# Allegro board TPA311X_TEST_V10B.brd
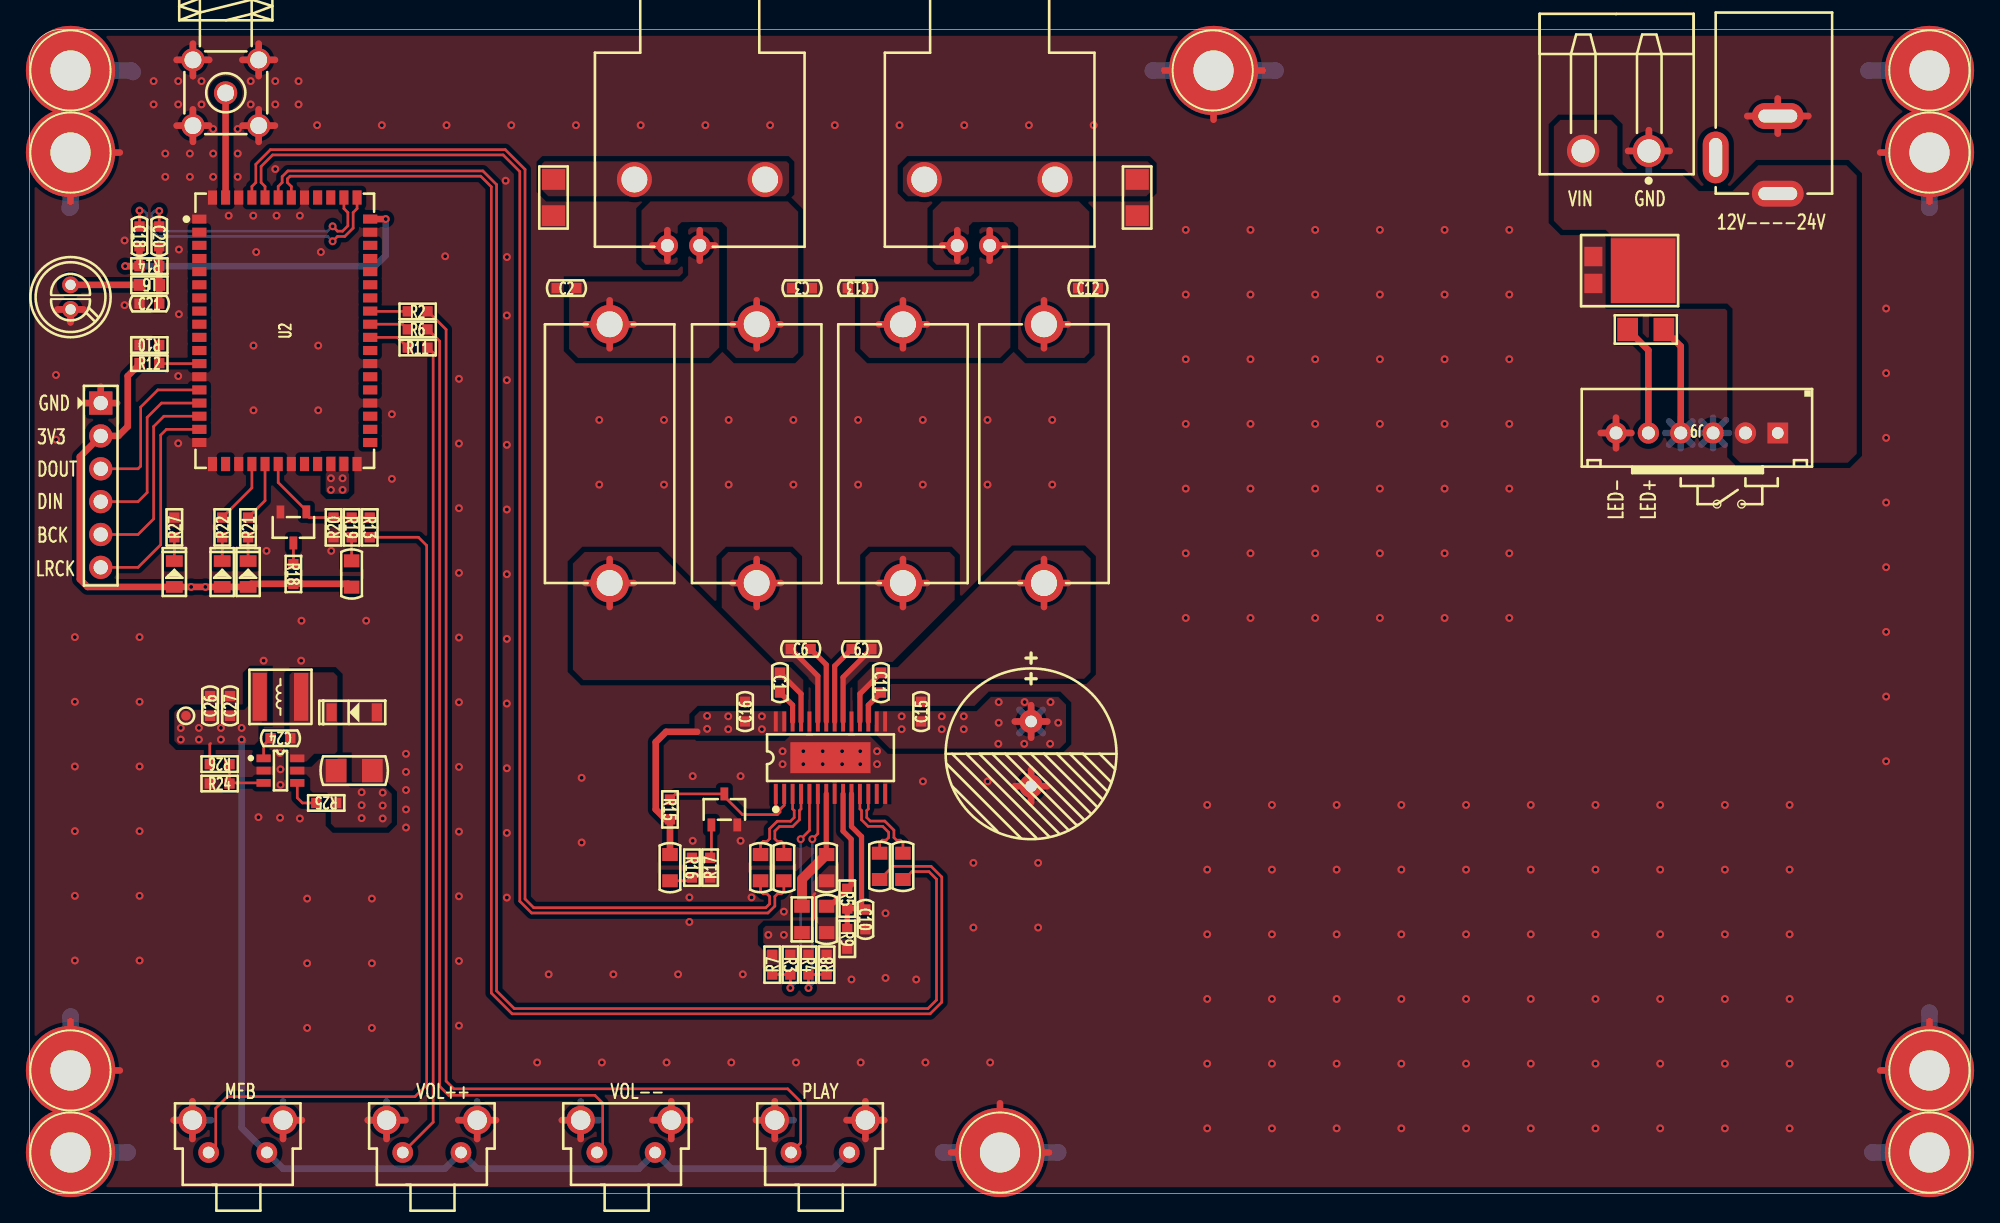
[diagram p0: board, top side]
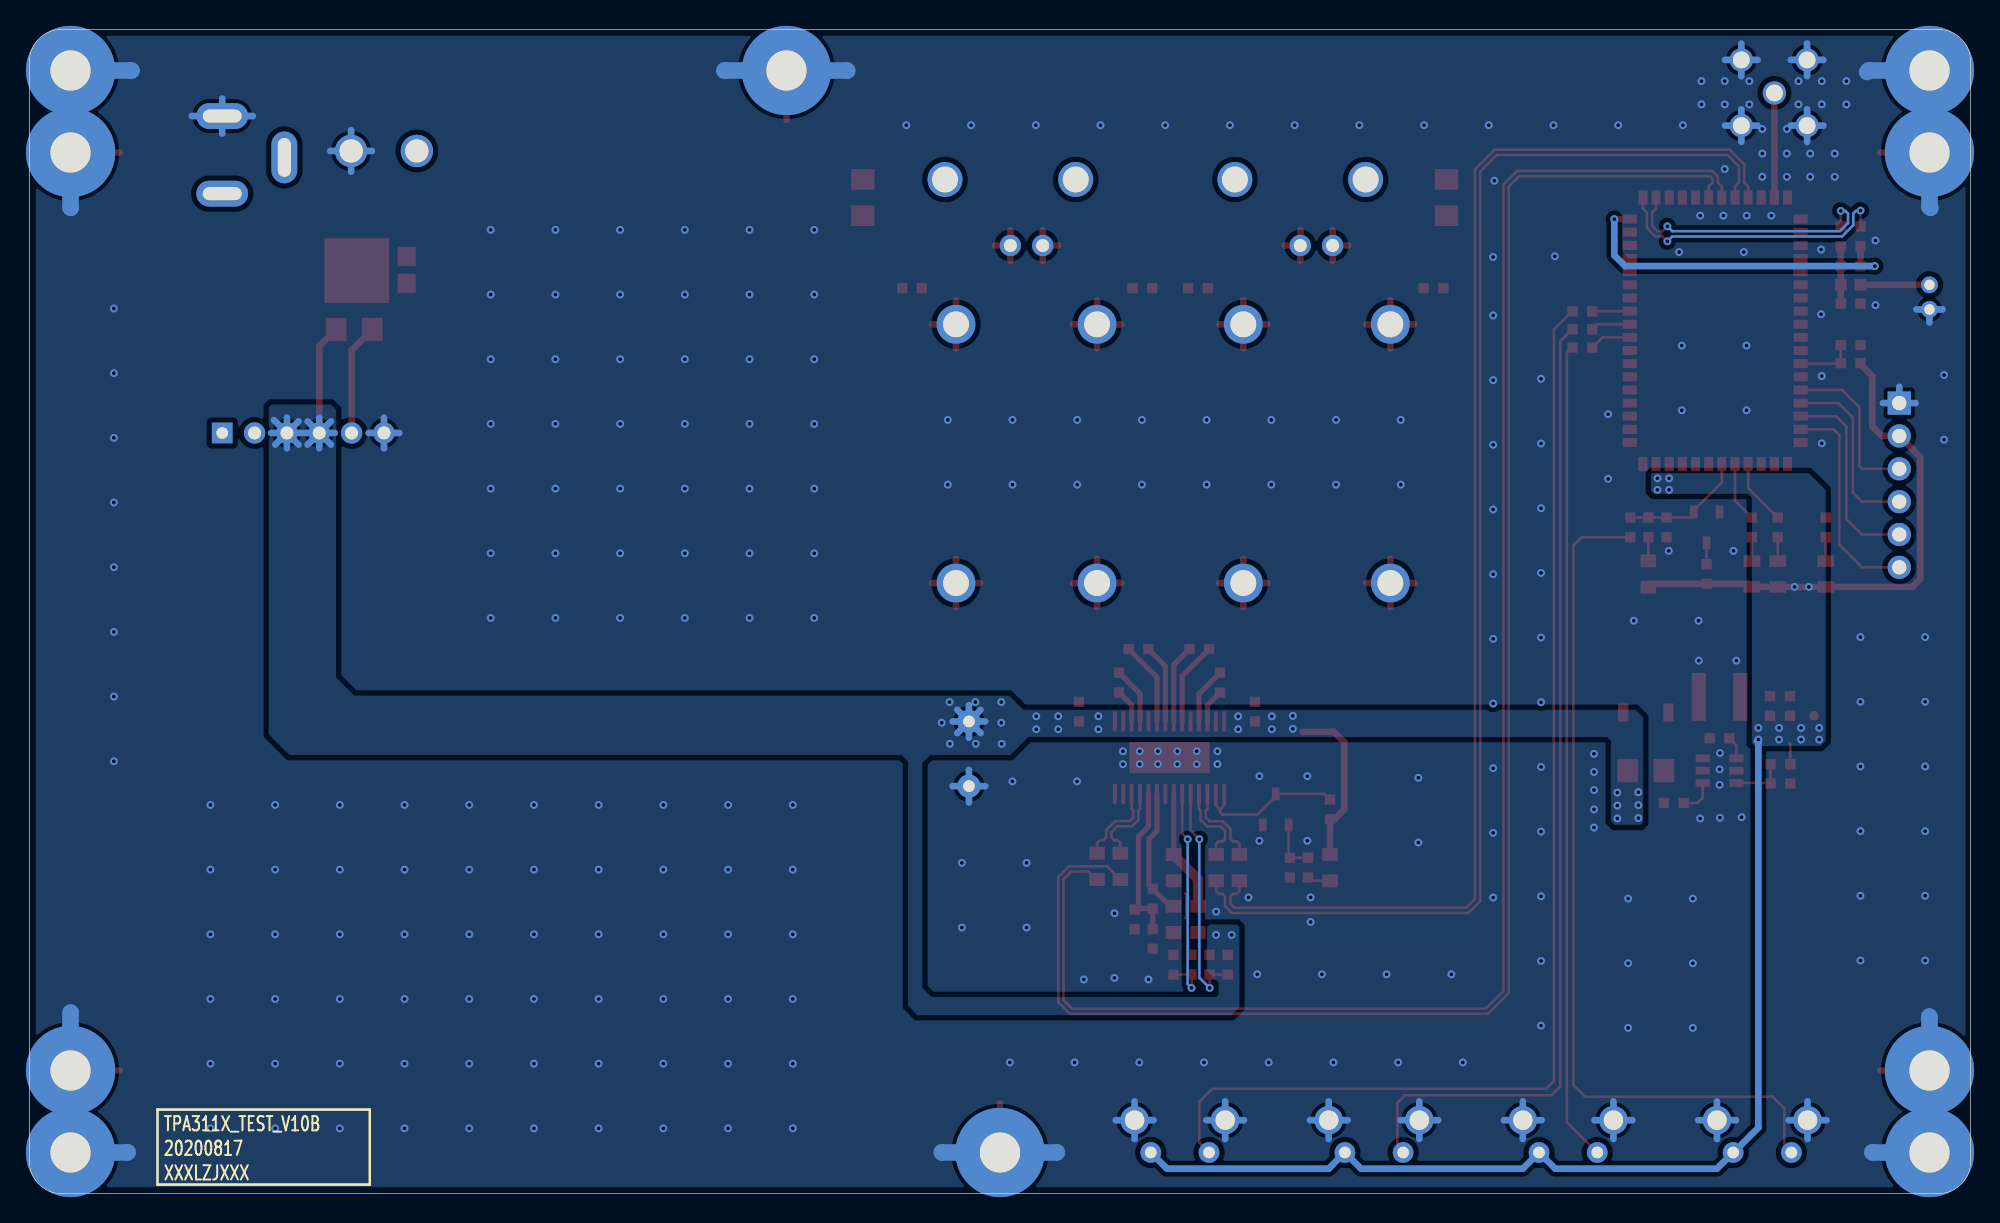
[diagram p1: board, bottom side, seen from below]

Outline 150 x 90 mm; copper layers: TOP, BOTTOM. Coordinates in mm from the lower left corner of the outline.
Outline path: 0,87.5 arc(0.73,89.27) 2.5,90 147.5,90 arc(149.27,89.27) 150,87.5 150,2.5 arc(149.27,0.73) 147.5,0 2.5,0 arc(0.73,0.73) 0,2.5 0,87.5

## Design rules (mm)
constraint set DEFAULT: min track width 0.203, pair gap 0.203
net group LIN: nets LINN LINP
net group MIC_A: nets MIC_AN MIC_AP
net group RIN: nets RINN RINP
net group SPK_L: nets SPK_LN SPK_LP
net group SPK_R: nets SPK_RN SPK_RP

## Placement (name value [footprint] x y rotation side)
C1  220nF_50V  [C0603]  58 39.5 270 top
C2  1nF_50V  [C0603]  41.5 70 0 top
C3  1nF_50V  [C0603]  59.7 70 180 top
C4  1uF_50V  [C0805]  56.5 25.2 90 top
C5  1uF_50V  [C0805]  58.3 25.2 90 top
C6  220nF_50V  [C0603]  59.6 42.1 0 top
C7  1uF_50V  [C0805]  61.6 21.2 90 top
C8  1uF_50V  [C0805]  61.6 25.2 90 top
C9  220nF_50V  [C0603]  64.3 42.1 180 top
C10  10nF_50V  [C0603]  64.6 21.2 270 top
C11  220nF_50V  [C0603]  65.8 39.5 270 top
C12  1nF_50V  [C0603]  81.8 70 0 top
C13  1nF_50V  [C0603]  64 70 180 top
C14  1uF_50V  [C0805]  65.7 25.3 90 top
C15  10nF_50V  [C0603]  68.9 37.26 90 top
C16  10nF_50V  [C0603]  55.3 37.26 90 top
C17  1000uF_50V  [CAP-5R0-13X27]  77.4 34 270 top
C18  100nF_50V  [C0603]  8.51 74 270 top
C19  1uF_50V  [C0805]  67.5 25.3 90 top
C20  100nF_50V  [C0603]  10.03 74 270 top
C21  15pF_50V  [C0603]  9.27 68.8 0 top
C22  1uF_50V  [C0805]  49.5 25.2 90 top
C23  1uF_50V  [C0805]  24.9 47.9 270 top
C24  100nF_50V  [C0603]  19.4 35.2 180 top
C25  10uF_35V  [C1206]  25.1 32.7 0 top
C26  10uF_10V  [C0603]  13.96 37.7 90 top
C27  10uF_10V  [C0603]  15.5 37.7 90 top
D1  LED_RED  [LED0805]  16.9 47.9 90 top
D2  LED_BLUE  [LED0805]  14.9 47.9 90 top
D3  LMBR140  [SOD123]  25.1 37.2 0 top
D4  V10P10  [TO-277A]  122.2 71.4 270 top
D5  LED_RED  [LED0805]  11.2 47.9 90 top
DC1  -  [DC005]  135.1 83.3 270 top
J1  SMA-50R/NI  [SMA-50R-DIP]  15.18 85.1 90 top
J2  -  [CN1X6-2P54-Z]  5.51 61.11 270 top
J5  WJ2EDGRC-5.08-2P  [WJ2EDGRC-5R08-2P]  122.6 80.6 180 top
J9  -  [HX25035-6A]  128.85 58.8 180 top
L1  1mH  [L-10MMX20MM]  44.84 57.2 90 top
L2  1mH  [L-10MMX20MM]  56.2 57.2 90 top
L3  1mH  [L-10MMX20MM]  67.5 57.2 90 top
L4  1mH  [L-10MMX20MM]  78.4 57.2 90 top
L5  15nH  [L0603]  9.27 70.25 180 top
L6  SWPA4020S150MT  [L4020]  19.4 38.4 180 top
MH1  HOLD-M3/NI  [HOLD6R90X3R10]  3.18 3.18 0 top
MH2  HOLD-M3/NI  [HOLD6R90X3R10]  75 3.18 0 top
MH3  HOLD-M3/NI  [HOLD6R90X3R10]  146.82 3.18 0 top
MH4  HOLD-M3/NI  [HOLD6R90X3R10]  146.82 9.52 0 top
MH5  HOLD-M3/NI  [HOLD6R90X3R10]  3.18 9.52 0 top
MH6  HOLD-M3/NI  [HOLD6R90X3R10]  146.82 80.48 0 top
MH7  HOLD-M3/NI  [HOLD6R90X3R10]  146.82 86.82 0 top
MH8  HOLD-M3/NI  [HOLD6R90X3R10]  91.5 86.82 0 top
MH9  HOLD-M3/NI  [HOLD6R90X3R10]  3.18 86.82 0 top
MH10  HOLD-M3/NI  [HOLD6R90X3R10]  3.18 80.48 0 top
NOREF  -  []  0 0 90 top
NOREF#2  -  []  0 0 90 top
NOREF#3  -  []  0 0 90 top
NOREF#4  -  []  0 0 0 top
NOREF#5  -  []  0 0 0 top
NOREF#6  -  []  0 0 0 top
NOREF#7  -  []  0 0 0 top
NOREF#8  -  []  0 0 0 top
NOREF#9  -  []  0 0 90 top
NOREF#10  -  []  0 0 90 top
Q1  MMBT3904  [SOT23-3]  53.7 29.7 0 top
Q2  MMBT3904  [SOT23-3]  20.4 51.5 180 top
R1  10R  [R0805]  59.7 21.2 90 top
R2  1K  [R0603]  30 68.2 0 top
R3  0R/NI  [R0603]  58.8 17.7 270 top
R4  0R/NI  [R0603]  60.2 17.7 270 top
R5  10K  [R0603]  63.2 22.8 270 top
R6  1K  [R0603]  30 66.81 0 top
R7  0R  [R0603]  57.4 17.7 90 top
R8  0R  [R0603]  61.6 17.7 90 top
R9  10K  [R0603]  63.2 19.7 270 top
R10  0R/NI  [R0603]  9.27 65.6 180 top
R11  1K  [R0603]  30 65.4 0 top
R12  0R/NI  [R0603]  9.27 64.2 0 top
R13  1K  [R0603]  26.3 51.5 270 top
R14  2.2K  [R0603]  9.27 71.7 180 top
R15  100K  [R0603]  49.5 29.7 270 top
R16  47K  [R0603]  51.2 25.2 270 top
R17  10K  [R0603]  52.6 25.2 90 top
R18  10K  [R0603]  20.4 47.9 270 top
R19  1K  [R0603]  24.9 51.5 270 top
R20  10K  [R0603]  23.5 51.5 90 top
R21  1K  [R0603]  16.9 51.5 90 top
R22  1K  [R0603]  14.9 51.5 90 top
R23  0R  [R1206]  85.6 77 90 top
R24  40.2K  [R0603]  14.7 31.7 0 top
R25  499K  [R0603]  22.94 30.2 180 top
R26  124K  [R0603]  14.7 33.2 180 top
R27  10K  [R0603]  11.2 51.5 90 top
R28  10K  [R1206]  124.9 66.8 180 top
R29  0R  [R1206]  40.5 77 90 top
SW1  KEY  [SW-6X6X6-L]  61.1 3.18 0 top
SW2  KEY  [SW-6X6X6-L]  46.1 3.18 0 top
SW3  KEY  [SW-6X6X6-L]  31.1 3.18 0 top
SW4  KEY  [SW-6X6X6-L]  16.1 3.18 0 top
TP1  TestPoint/NI  [TP-0R75]  12.1 36.94 0 top
U1  TPA3110D2PWPR  [HTSSOP28-9R7X4R4X0R65-6R1X2R4]  61.9 33.7 0 top
U2  -  [BTM308-C]  19.73 66.7 0 top
U3  -  [MIC]  3.18 69.3 270 top
U4  -  [RCA-SOCKET]  51.8 73.29 270 top
U5  -  [RCA-SOCKET]  74.2 73.29 270 top
U6  MP2456GJ  [SOT23-6]  19.4 32.7 270 top

## Library data of the parts
C1-C16 C18-C23 = CAP NP_2
C17 = CAPT_100UF_3528_6r3V_10%_LXXXX
C24-C27 = CAP NP
D1 D2 D5 = LED_4
D3 = DIODE13_9
D4 = DIODE13_6
DC1 = DC005
J1 = SMA-50R_0
J2 J9 = CONN RCPT 6
J5 = CONN RCPT 2
L1-L6 = INDUCTOR_0
MH1-MH10 = Hold_1
Q1 Q2 = L14G1/TO_2
R1-R29 = R_Generic
SW1-SW4 = SWITCH-SPST-4P
TP1 = TestPoint
U1 = TPA3110D2PWPR
U2 = BTM308-C_0
U3 = MIC
U4 U5 = RCA-SOCKET
U6 = MP2451DT

## Footprints (pads in the part's own frame, mm; a bottom-side part is the same pattern mirrored in y, then rotated)
BTM308-C
  rect 1.1x0.7 smd: 1(-6.6,8.636) 2(-6.6,7.62) 3(-6.6,6.604) 4(-6.6,5.588) 5(-6.6,4.572) 6(-6.6,3.556) 7(-6.6,2.54) 8(-6.6,1.524) 9(-6.6,0.508) 10(-6.6,-0.508) 11(-6.6,-1.524) 12(-6.6,-2.54) 13(-6.6,-3.556) 14(-6.6,-4.572) 15(-6.6,-5.588) 16(-6.6,-6.604) 17(-6.6,-7.62) 18(-6.6,-8.636) 31(6.6,-8.636) 32(6.6,-7.62) 33(6.6,-6.604) 34(6.6,-5.588) 35(6.6,-4.572) 36(6.6,-3.556) 37(6.6,-2.54) 38(6.6,-1.524) 39(6.6,-0.508) 40(6.6,0.508) 41(6.6,1.524) 42(6.6,2.54) 43(6.6,3.556) 44(6.6,4.572) 45(6.6,5.588) 46(6.6,6.604) 47(6.6,7.62) 48(6.6,8.636)
  rect 0.7x1.1 smd: 19(-5.588,-10.3) 20(-4.572,-10.3) 21(-3.556,-10.3) 22(-2.54,-10.3) 23(-1.524,-10.3) 24(-0.508,-10.3) 25(0.508,-10.3) 26(1.524,-10.3) 27(2.54,-10.3) 28(3.556,-10.3) 29(4.572,-10.3) 30(5.588,-10.3) 49(5.588,10.3) 50(4.572,10.3) 51(3.556,10.3) 52(2.54,10.3) 53(1.524,10.3) 54(0.508,10.3) 55(-0.508,10.3) 56(-1.524,10.3) 57(-2.54,10.3) 58(-3.556,10.3) 59(-4.572,10.3) 60(-5.588,10.3)
C0603
  rect 0.8x0.8 smd: 1(-0.762,0) 2(0.762,0)
C0805
  rect 1x1.2 smd: 1(-1.016,0) 2(1.016,0)
C1206
  rect 1.6x1.8 smd: 1(-1.4,0) 2(1.4,0)
CAP-5R0-13X27
  round 1.8 hole 0.9: 1(-2.5,0) 2(2.5,0)
CN1X6-2P54-Z
  rect 1.8x1.8 hole 1.1: 1(0,0)
  round 1.8 hole 1.1: 2(2.54,0) 3(5.08,0) 4(7.62,0) 5(10.16,0) 6(12.7,0)
DC005
  oval 2x4 hole 1x3: 1(6,0) 2(0,0)
  oval 4x2 hole 3x1: 3(3.2,-4.8)
HOLD6R90X3R10
  round 6.9 hole 3.1: 1(0,0)
HTSSOP28-9R7X4R4X0R65-6R1X2R4
  rect 0.3x1.55 smd: 1(-4.225,-2.8) 2(-3.575,-2.8) 3(-2.925,-2.8) 4(-2.275,-2.8) 5(-1.625,-2.8) 6(-0.975,-2.8) 7(-0.325,-2.8) 8(0.325,-2.8) 9(0.975,-2.8) 10(1.625,-2.8) 11(2.275,-2.8) 12(2.925,-2.8) 13(3.575,-2.8) 14(4.225,-2.8) 15(4.225,2.8) 16(3.575,2.8) 17(2.925,2.8) 18(2.275,2.8) 19(1.625,2.8) 20(0.975,2.8) 21(0.325,2.8) 22(-0.325,2.8) 23(-0.975,2.8) 24(-1.625,2.8) 25(-2.275,2.8) 26(-2.925,2.8) 27(-3.575,2.8) 28(-4.225,2.8)
  rect 6.2x2.4 smd: 29(0,0)
HX25035-6A
  rect 1.6x1.6 hole 0.9: 1(-6.25,0)
  round 1.65 hole 1: 2(-3.75,0) 3(-1.25,0) 4(1.25,0) 5(3.75,0) 6(6.25,0)
L0603
  rect 0.914x0.914 smd: 1(-0.762,0) 2(0.762,0)
L4020
  rect 1.1x3.7 smd: 1(-1.6,0) 2(1.6,0)
L-10MMX20MM
  round 3 hole 2: 1(-10,0) 2(10,0)
LED0805
  rect 0.9x1.3 smd: 1(-1,0) 2(1,0)
MIC
  round 1.3 hole 0.8: 1(-0.95,0) 2(0.95,0)
R0603
  rect 0.8x0.8 smd: 1(-0.762,0) 2(0.762,0)
R0805
  rect 1x1.2 smd: 1(-1.016,0) 2(1.016,0)
R1206
  rect 1.6x1.8 smd: 1(-1.4,0) 2(1.4,0)
RCA-SOCKET
  round 1.65 hole 1: 1(0,0) 2(0,-2.5)
  round 2.7 hole 2: 3(-5.1,5.05) 4(-5.1,-5.05)
SMA-50R-DIP
  round 1.8 hole 1.3: 1(-0.016,0.016) 2(-2.54,2.54) 3(-2.54,-2.54) 4(2.54,-2.54) 5(2.54,2.54)
SOD123
  rect 0.8x1.4 smd: 1(1.75,0) 2(-1.75,0)
SOT23-3
  rect 0.6x1 smd: 1(-1,-1.2) 2(1,-1.2) 3(0,1.2)
SOT23-6
  rect 0.6x1.1 smd: 1(-0.95,-1.3) 2(0,-1.3) 3(0.95,-1.3) 4(0.95,1.3) 5(0,1.3) 6(-0.95,1.3)
SW-6X6X6-L
  round 2.2 hole 1.5: 1(-3.5,2.5) 4(3.5,2.5)
  round 1.6 hole 0.9: 2(-2.25,0) 3(2.25,0)
TO-277A
  rect 1.5x1.4 smd: 1(-1.04,-1.35) 2(1.04,-1.35)
  rect 5x5 smd: 3(0.05,2.5)
TP-0R75
  round 0.75 smd: 1(0,0)
WJ2EDGRC-5R08-2P
  round 2.5 hole 1.8: 1(-2.54,0) 2(2.54,0)

## Nets
GND: C2.1 C3.1 C7.1 C8.1 C10.2 C12.2 C13.2 C15.2 C16.2 C17.2 C21.1 C25.2 C26.2 C27.2 D3.1 D4.1 D4.2 DC1.2 J1.2 J1.3 J1.4 J1.5 J2.1 J5.1 J9.6 MH1.1 MH2.1 MH3.1 MH4.1 MH5.1 MH6.1 MH7.1 MH8.1 MH9.1 MH10.1 Q1.2(E) Q2.2(E) R7.2 R8.2 R9.2 R10.2 R17.1 R20.1 R23.1 R24.1 R27.2 R29.1 SW1.1 SW1.4 SW2.1 SW2.4 SW3.1 SW3.4 SW4.1 SW4.4 U1.8 U1.14 U1.19 U1.24 U1.29 U2.1 U2.13 U2.18 U2.19 U2.21 U2.25 U2.30 U2.34 U2.37 U2.47 U2.53 U2.58 U2.60 U3.2(-) U6.2
VCC_3.3V: C23.2 C26.1 C27.1 D1.1 D2.1 D5.1 J2.2 L6.2 R12.1 R18.2 R26.2 SW1.3 SW2.3 SW3.3 SW4.3 TP1.1 U2.28 U2.29
VCC_24V: C15.1 C16.1 C17.1 C22.2 C25.1 J9.3 J9.4 R1.1 R3.1 R4.1 R15.2 R25.1 R28.1 U1.15 U1.16 U1.27 U1.28 U6.5(VIN)
VCC_24V_IN: D4.3(CATHODE) DC1.1 J5.2 J9.1 J9.2
GAIN0: R3.2 R7.1 U1.5
GAIN1: R4.2 R8.1 U1.6
IIS_BCK: J2.5 U2.16
IIS_DATA_IN: J2.4 U2.15
IIS_DATA_OUT: J2.3 U2.14
IIS_LRCK: J2.6 U2.17
KEY0: R2.1 U2.41
KEY1: R6.1 U2.40
KEY2: R11.1 U2.39
LED0: R21.2 U2.23
LED1: R22.2 U2.22
LED+: J9.5 R28.2
LINN: C5.2 U1.4
LINP: C4.2 U1.3
MFB: Q2.1 R13.1 R19.1 R20.2 U2.24
MIC_AN: C18.1 U2.49
MIC_AP: C20.1 U2.50
MIC_BIAS: C18.2 R14.2 U2.48
OUTL_N: C3.2 L2.2 U4.2
OUTL_P: C2.2 L1.2 U4.1
OUTR_N: C12.1 L4.2 U5.2
OUTR_P: C13.1 L3.2 U5.1
RF_ANT: J1.1 U2.59
RINN: C14.2 U1.11
RINP: C19.2 U1.12
SD: Q1.3 R15.1 U1.1(S\D\) U1.2
SPK_LN: C5.1 U2.56
SPK_LP: C4.1 U2.57
SPK_RN: C14.1 U2.54
SPK_RP: C19.1 U2.55
N17106206: C8.2 R1.2 U1.7
N17106914: C7.2 R5.1 U1.9
N17107482: C10.1 R5.2 R9.1 U1.10
N17107682: C1.2 U1.26
N17107694: C1.1 L1.1 U1.25
N17107988: C6.2 U1.22
N17107991: C6.1 L2.1 U1.23
N17109509: C9.2 U1.21
N17110158: C9.1 L3.1 U1.20
N17110390: C11.1 L4.1 U1.18
N17110423: C11.2 U1.17
N17131851: R10.1 R12.2 U2.12
N17139476: R11.2 SW3.2
N17139479: R6.2 SW2.2
N17139482: R2.2 SW1.2
N17139571: R13.2 SW4.2
N17139755: L5.2 U3.1
N17140355: C20.2 C21.2 L5.1 R14.1
N17141241: Q2.3 R18.1
N17141960: C23.1 R19.2
N17143378: D1.2(CATHODE) R21.1
N17143400: D2.2(CATHODE) R22.1
N17144540: C22.1 R16.2
N17144552: Q1.1 R16.1 R17.2
N17146336: C24.1 D3.2(ANODE_2) L6.1 U6.6
N17146514: R24.2 R26.1 U6.3
N17146924: R25.2 U6.4
N17147250: C24.2 U6.1
N17149786: R29.2 U4.3 U4.4
N17149794: R23.2 U5.3 U5.4
N17153384: D5.2(CATHODE) R27.1

Pads without a net: DC1 3; U1 13; U2 2 3 4 5 6 7 8 9 10 11 20 26 27 31 32 33 35 36 38 42 43 44 45 46 51 52

## Via types
v1: diameter 0.61, hole 0.305, TOP to BOTTOM, 337 vias

## Routing (per net, layer and track width the routed paths; a pad name or vN(x,y) marks a point on that pad's centre or on a via; arc(x,y) is an arc through that point)
GND: length 317.1
  TOP w0.203: 60.7,23.2 60.6,23.1 60.6,21.4 60.7,21.3
  TOP w0.508: C17.2 78.66,31.5 ; C17.2 77.4,32.76 ; C17.2 77.4,30.24 ; C17.2 76.14,31.5 ; 12.64,81.3 J1.2 ; J1.2 13.89,82.56 ; J1.2 11.38,82.56 ; J1.2 12.64,83.82 ; 12.6,4.22 SW4.1 ; SW4.1 12.6,7.14 ; SW4.1 11.14,5.68 ; SW1.1 57.6,7.14 ; SW1.1 57.6,4.22 ; SW1.1 56.14,5.68 ; 135.1,81.94 DC1.2 ; DC1.2 132.74,83.3 ; DC1.2 135.1,84.66 ; DC1.2 137.46,83.3 ; 16.46,87.64 J1.4 ; J1.4 17.72,86.38 ; J1.4 18.97,87.64 ; J1.4 17.72,88.9 ; SW1.4 66.06,5.68 ; SW1.4 63.14,5.68 ; SW1.4 64.6,7.14 ; SW1.4 64.6,4.22 ; 17.72,81.3 J1.3 ; J1.3 17.72,83.82 ; J1.3 18.97,82.56 ; J1.3 16.46,82.56 ; J5.1 125.14,82.21 ; J5.1 123.53,80.6 ; J5.1 126.75,80.6 ; J2.1 5.51,62.37 ; J2.1 4.26,61.11 ; J2.1 6.77,61.11 ; 87.69,86.82 MH8.1 ; MH8.1 91.5,83.01 ; MH8.1 95.31,86.82 ; 27.6,4.22 SW3.1 ; SW3.1 29.06,5.68 ; SW3.1 26.14,5.68 ; 12.64,86.38 J1.5 ; J1.5 12.64,88.9 ; J1.5 11.38,87.64 ; J1.5 13.89,87.64 ; 146.82,76.67 MH6.1 143.01,80.48 ; 49.6,4.22 SW2.4 ; SW2.4 48.14,5.68 ; SW2.4 51.06,5.68 ; SW2.4 49.6,7.14 ; 42.6,4.22 SW2.1 41.14,5.68 ; 33.14,5.68 SW3.4 ; SW3.4 36.06,5.68 ; SW3.4 34.6,4.22 ; 2.17,68.35 U3.2 ; U3.2 3.18,67.34 ; U3.2 4.19,68.35 ; MH2.1 75,6.99 ; MH2.1 78.81,3.18 ; MH2.1 71.19,3.18 ; J9.6 122.6,59.98 ; J9.6 121.42,58.8 ; J9.6 123.78,58.8 ; J9.6 122.6,57.62 ; 143.01,9.52 MH4.1 146.82,13.33 ; 19.6,4.22 SW4.4 ; SW4.4 18.14,5.68 ; SW4.4 21.06,5.68 ; 3.18,76.67 MH10.1 6.99,80.48 ; 3.18,13.33 MH5.1 6.99,9.52
  BOTTOM w0.508: 34.6,4.22 SW3.4 ; SW3.4 33.14,5.68 ; SW3.4 34.6,7.14 ; SW3.4 36.06,5.68 ; C17.2 78.66,31.5 ; C17.2 76.14,31.5 ; C17.2 77.4,32.76 ; C17.2 77.4,30.24 ; 125.14,78.99 J5.1 ; J5.1 126.75,80.6 ; J5.1 125.14,82.21 ; J5.1 123.53,80.6 ; J1.3 17.72,83.82 ; J1.3 17.72,81.3 ; J1.3 16.46,82.56 ; J1.3 18.97,82.56 ; 12.64,81.3 J1.2 ; J1.2 11.38,82.56 ; J1.2 12.64,83.82 ; J1.2 13.89,82.56 ; J9.6 122.6,59.98 ; J9.6 121.42,58.8 ; J9.6 123.78,58.8 ; J9.6 122.6,57.62 ; SW2.1 42.6,7.14 ; SW2.1 42.6,4.22 ; SW2.1 44.06,5.68 ; SW2.1 41.14,5.68 ; 19.6,4.22 SW4.4 ; SW4.4 18.14,5.68 ; SW4.4 21.06,5.68 ; SW4.4 19.6,7.14 ; J1.5 13.89,87.64 ; J1.5 11.38,87.64 ; J1.5 12.64,88.9 ; J1.5 12.64,86.38 ; 63.14,5.68 SW1.4 ; SW1.4 64.6,4.22 ; SW1.4 66.06,5.68 ; SW1.4 64.6,7.14 ; 48.14,5.68 SW2.4 ; SW2.4 49.6,7.14 ; SW2.4 49.6,4.22 ; SW2.4 51.06,5.68 ; SW3.1 27.6,7.14 ; SW3.1 29.06,5.68 ; SW3.1 26.14,5.68 ; SW3.1 27.6,4.22 ; 135.1,81.94 DC1.2 ; DC1.2 137.46,83.3 ; DC1.2 132.74,83.3 ; DC1.2 135.1,84.66 ; J2.1 5.51,62.37 ; J2.1 4.26,61.11 ; J2.1 6.77,61.11 ; 17.72,86.38 J1.4 ; J1.4 17.72,88.9 ; J1.4 18.97,87.64 ; J1.4 16.46,87.64 ; SW1.1 59.06,5.68 ; SW1.1 57.6,4.22 ; SW1.1 56.14,5.68 ; SW1.1 57.6,7.14 ; SW4.1 12.6,7.14 ; SW4.1 14.06,5.68 ; SW4.1 12.6,4.22 ; SW4.1 11.14,5.68 ; 3.18,67.34 U3.2 ; U3.2 2.17,68.35 ; U3.2 4.19,68.35
  BOTTOM w1.27: 146.8,76.2 146.82,76.22 MH6.1 MH7.1 142.12,86.82 142.1,86.8 ; 3.1,76.2 3.18,76.28 MH10.1 MH9.1 7.88,86.82 8,86.7 ; 3.2,13.7 3.18,13.68 MH5.1 MH1.1 7.58,3.18 7.6,3.2 ; 79.5,3.2 79.48,3.18 MH2.1 70.62,3.18 70.6,3.2 ; 146.8,14 146.82,13.98 MH4.1 MH3.1 142.42,3.18 142.4,3.2 ; 86.8,86.8 86.82,86.82 MH8.1 96.28,86.82 96.3,86.8
  vias: v1(2.05,63.28) v1(2.05,58.28) v1(3.51,43.02) v1(3.51,38.02) v1(3.51,33.02) v1(3.51,28.02) v1(3.51,23.02) v1(3.51,18.02) v1(7.35,73.68) v1(7.35,68.68) v1(8.51,43.02) v1(8.51,38.02) v1(8.51,33.02) v1(8.51,28.02) v1(8.51,23.02) v1(8.51,18.02) v1(9.6,86) v1(9.6,84.2) v1(10.5,80.4) v1(10.5,78.6) v1(11.5,86) v1(11.5,84.2) v1(11.5,63.2) v1(11.5,58) v1(11.55,72.98) v1(11.55,67.98) v1(12.4,80.4) v1(12.4,78.6) v1(13.3,86) v1(13.3,84.2) v1(14.2,82.3) v1(14.2,80.4) v1(14.2,78.6) v1(15.4,75.6) v1(16.1,82.3) v1(16.1,80.4) v1(16.1,78.6) v1(17.1,86) v1(17.1,84.2) v1(17.3,75.6) v1(17.32,65.55) v1(17.32,60.55) v1(17.52,72.79) v1(17.7,29.1) v1(18.1,41.2) v1(18.32,49.69) v1(19,86) v1(19,84.2) v1(19,79.2) v1(19.1,75.6) v1(19.37,34.06) v1(19.4,32.8) v1(19.4,31.6) v1(19.37,29.06) v1(20.8,86) v1(20.8,84.2) v1(20.9,75.6) v1(20.9,29) v1(21.02,44.29) v1(21,41.2) v1(21.46,22.81) v1(21.46,17.81) v1(21.46,12.81) v1(22.23,82.59) v1(22.32,65.55) v1(22.32,60.55) v1(22.52,72.79) v1(23.32,49.69) v1(26.02,44.29) v1(26.46,22.81) v1(26.46,17.81) v1(26.46,12.81) v1(27.23,82.59) v1(28.01,60.25) v1(28.01,55.25) v1(29.1,34) v1(29.1,32.6) v1(29.1,31.2) v1(29.1,29.7) v1(29.1,28.3) v1(32.13,72.46) v1(32.23,82.59) v1(33.19,62.99) v1(33.19,57.99) v1(33.19,52.99) v1(33.19,47.99) v1(33.19,42.99) v1(33.19,37.99) v1(33.19,32.99) v1(33.19,27.99) v1(33.19,22.99) v1(33.19,17.99) v1(33.19,12.99) v1(36.8,78.3) v1(36.9,72.4) v1(36.89,67.89) v1(36.89,62.89) v1(36.89,57.89) v1(36.89,52.89) v1(36.89,47.89) v1(36.89,42.89) v1(36.89,37.89) v1(36.89,32.89) v1(36.89,27.89) v1(36.89,22.89) v1(37.23,82.59) v1(39.24,10.14) v1(40.13,16.95) v1(42.23,82.59) v1(42.67,32.14) v1(42.67,27.14) v1(44.04,59.81) v1(44.04,54.81) v1(44.24,10.14) v1(45.13,16.95) v1(47.23,82.59) v1(49.04,59.81) v1(49.04,54.81) v1(49.24,10.14) v1(50.13,16.95) v1(51,22.9) v1(51,21) v1(51.25,32.27) v1(51.25,27.27) v1(52.23,82.59) v1(54.04,59.81) v1(54.04,54.81) v1(54.24,10.14) v1(54.95,32.27) v1(54.95,27.27) v1(55.13,16.95) v1(55.8,22.9) v1(57.23,82.59) v1(58.2,34.2) v1(58.2,33.2) v1(58.3,21.8) v1(59.04,59.81) v1(59.04,54.81) v1(59.24,10.14) v1(59.8,34.2) v1(59.8,33.2) v1(61.3,34.2) v1(61.3,33.2) v1(62.23,82.59) v1(62.8,34.2) v1(62.8,33.2) v1(63.53,16.55) v1(64.04,59.81) v1(64.04,54.81) v1(64.2,34.2) v1(64.2,33.2) v1(64.24,10.14) v1(65.5,34.2) v1(65.5,33.2) v1(66.15,21.67) v1(66.15,16.67) v1(67.23,82.59) v1(68.53,16.55) v1(69.04,59.81) v1(69.04,54.81) v1(69.04,31.87) v1(69.24,10.14) v1(72.23,82.59) v1(72.94,25.57) v1(72.94,20.57) v1(74.04,59.81) v1(74.04,54.81) v1(74.04,31.87) v1(74.24,10.14) v1(77.23,82.59) v1(77.94,25.57) v1(77.94,20.57) v1(79.04,59.81) v1(79.04,54.81) v1(82.23,82.59) v1(89.35,74.5) v1(89.35,69.5) v1(89.35,64.5) v1(89.35,59.5) v1(89.35,54.5) v1(89.35,49.5) v1(89.35,44.5) v1(91.01,30.05) v1(91.01,25.05) v1(91.01,20.05) v1(91.01,15.05) v1(91.01,10.05) v1(91.01,5.05) v1(94.35,74.5) v1(94.35,69.5) v1(94.35,64.5) v1(94.35,59.5) v1(94.35,54.5) v1(94.35,49.5) v1(94.35,44.5) v1(96.01,30.05) v1(96.01,25.05) v1(96.01,20.05) v1(96.01,15.05) v1(96.01,10.05) v1(96.01,5.05) v1(99.35,74.5) v1(99.35,69.5) v1(99.35,64.5) v1(99.35,59.5) v1(99.35,54.5) v1(99.35,49.5) v1(99.35,44.5) v1(101.01,30.05) v1(101.01,25.05) v1(101.01,20.05) v1(101.01,15.05) v1(101.01,10.05) v1(101.01,5.05) v1(104.35,74.5) v1(104.35,69.5) v1(104.35,64.5) v1(104.35,59.5) v1(104.35,54.5) v1(104.35,49.5) v1(104.35,44.5) v1(106.01,30.05) v1(106.01,25.05) v1(106.01,20.05) v1(106.01,15.05) v1(106.01,10.05) v1(106.01,5.05) v1(109.35,74.5) v1(109.35,69.5) v1(109.35,64.5) v1(109.35,59.5) v1(109.35,54.5) v1(109.35,49.5) v1(109.35,44.5) v1(111.01,30.05) v1(111.01,25.05) v1(111.01,20.05) v1(111.01,15.05) v1(111.01,10.05) v1(111.01,5.05) v1(114.35,74.5) v1(114.35,69.5) v1(114.35,64.5) v1(114.35,59.5) v1(114.35,54.5) v1(114.35,49.5) v1(114.35,44.5) v1(116.01,30.05) v1(116.01,25.05) v1(116.01,20.05) v1(116.01,15.05) v1(116.01,10.05) v1(116.01,5.05) v1(121.01,30.05) v1(121.01,25.05) v1(121.01,20.05) v1(121.01,15.05) v1(121.01,10.05) v1(121.01,5.05) v1(126.01,30.05) v1(126.01,25.05) v1(126.01,20.05) v1(126.01,15.05) v1(126.01,10.05) v1(126.01,5.05) v1(131.01,30.05) v1(131.01,25.05) v1(131.01,20.05) v1(131.01,15.05) v1(131.01,10.05) v1(131.01,5.05) v1(136.01,30.05) v1(136.01,25.05) v1(136.01,20.05) v1(136.01,15.05) v1(136.01,10.05) v1(136.01,5.05) v1(143.47,68.42) v1(143.47,63.42) v1(143.47,58.42) v1(143.47,53.42) v1(143.47,48.42) v1(143.47,43.42) v1(143.47,38.42) v1(143.47,33.42)
VCC_3.3V: length 123.4
  TOP w0.203: R26.2 13.94,34.74 14,34.8
  TOP w0.508: R12.1 8.51,64.11 7.6,63.2 7.6,59.3 6.87,58.57 J2.2 3.9,56.96 3.9,47.5 4.5,46.9 D5.1 v1(12.5,46.9) v1(13.6,46.9) D2.1 D1.1 17.14,47.14 R18.2 24.65,47.14 C23.2
  BOTTOM w0.508: v1(16.4,35.1) 16.5,35 16.4,34.9 16.4,5.1 18.32,3.18 SW4.3 19.61,1.92 32.09,1.92 SW3.3 34.61,1.92 47.09,1.92 SW2.3 49.61,1.92 62.09,1.92 SW1.3
  vias: v1(11.7,36) v1(11.7,35.1) v1(13.1,36) v1(13.1,35.1) v1(14.8,36) v1(14.8,35.1) v1(16.4,36) v1(23.3,55.3) v1(23.3,54.4) v1(24.2,55.3) v1(24.2,54.4)
VCC_24V: length 56.4
  TOP w0.508: C22.2 R15.2 49.16,28.94 48.4,29.7 48.4,34.9 49.2,35.7 51.6,35.7 ; 77.4,35.24 C17.1 ; C17.1 76.14,36.5 ; C17.1 78.66,36.5 ; C17.1 77.4,37.76 ; R28.1 127.6,65.5 J9.4
  BOTTOM w0.508: C17.1 78.66,36.5 ; C17.1 76.14,36.5 ; C17.1 76.5,37.4 ; C17.1 78.3,35.6 ; C17.1 77.4,35.24 ; C17.1 77.4,37.76 ; C17.1 76.5,35.6 ; C17.1 78.3,37.4 ; J9.3 129.2,57.9 ; J9.3 130.1,57.62 ; J9.3 128.92,58.8 ; J9.3 129.2,59.7 ; J9.3 131,57.9 ; J9.3 131.1,59.8 ; J9.3 131.32,58.8 ; J9.3 130.1,59.98 ; 127.6,57.62 J9.4 ; J9.4 128.5,59.7 ; J9.4 128.5,57.9 ; J9.4 126.4,58.8 ; J9.4 127.6,59.98 ; J9.4 126.7,57.9 ; J9.4 128.78,58.8 ; J9.4 126.7,59.7
  vias: v1(25.67,31.03) v1(25.67,30.03) v1(25.67,29.03) v1(27.3,31) v1(27.3,30) v1(27.3,29) v1(52.37,36.93) v1(52.37,35.93) v1(54,36.9) v1(54,35.9) v1(56.6,36.9) v1(56.6,35.9) v1(57.1,20) v1(58.3,20) v1(67.4,36.9) v1(67.4,35.9) v1(70.5,36.9) v1(70.5,35.9) v1(72.2,36.9) v1(72.2,35.9) v1(74.9,38) v1(74.9,36.4) v1(74.87,34.77) v1(76.9,38) v1(76.87,34.77) v1(78.9,38) v1(78.87,34.77) v1(79.5,36.4)
GAIN0: length 18
  TOP w0.203: R7.1 R3.2 v1(58.8,15.9) ; U1.5 60.27,28.07 v1(59.6,27.4)
  BOTTOM w0.203: v1(58.8,15.9) 59.6,16.7 v1(59.6,27.4)
GAIN1: length 17.7
  TOP w0.203: v1(60.5,27.4) 60.92,27.82 U1.6 ; v1(60.2,15.9) R4.2 R8.1
  BOTTOM w0.203: v1(60.2,15.9) 60.5,16.2 v1(60.5,27.4)
IIS_BCK: length 15.6
  TOP w0.203: J2.5 8.4,50.95 9.6,52.16 9.6,59.3 10.4,60.1 U2.16
IIS_DATA_IN: length 14.2
  TOP w0.203: U2.15 10.21,61.11 9.1,60 9.1,54.2 8.4,53.49 J2.4
IIS_DATA_OUT: length 12.8
  TOP w0.203: U2.14 9.93,62.13 8.6,60.8 8.6,56.24 8.4,56.03 J2.3
IIS_LRCK: length 17
  TOP w0.203: U2.17 10.59,59.08 10.15,58.64 10.15,50.16 8.4,48.41 J2.6
KEY0: length 2.9
  TOP w0.203: R2.1 26.36,68.2 U2.41
KEY1: length 3.1
  TOP w0.203: R6.1 28.84,67.21 U2.40
KEY2: length 3.2
  TOP w0.203: U2.39 28.45,66.19 R11.1
LED0: length 4.7
  TOP w0.203: U2.23 18.21,53.57 R21.2
LED1: length 5.1
  TOP w0.203: R22.2 17.19,54.56 U2.22
LED+: length 8.7
  TOP w0.508: J9.5 125.1,65.2 R28.2
LINN: length 6.6
  TOP w0.203: U1.4 59.62,29.74 59.5,29.62 59.5,28.9 58.98,28.38 57.96,28.38 57.6,28.03 57.6,27.43 57.81,27.22 58.1,27.22 58.3,27.02 C5.2
LINP: length 6.6
  TOP w0.203: U1.3 58.98,29.74 59.1,29.62 59.1,29.07 58.81,28.79 57.79,28.79 57.2,28.2 57.2,27.43 56.99,27.22 56.7,27.22 56.5,27.02 C4.2
MFB: length 9.8
  TOP w0.203: R13.1 R19.1 R20.2 21.64,52.26 21.4,52.5 Q2.1 21.4,52.8 19.23,54.97 U2.24
MIC_AN: length 22.2
  TOP w0.203: C18.1 v1(8.51,75.99) ; v1(23.43,73.62) 23.81,73.99 24.37,73.99 25.02,74.64 25.02,75.84 25.32,76.15 U2.49
  BOTTOM w0.203: v1(8.51,75.99) 8.51,75.97 8.87,75.97 9.07,75.76 9.07,74.86 9.93,73.99 23.05,73.99 v1(23.43,73.62)
MIC_AP: length 20.8
  TOP w0.203: U2.50 24.31,76.15 24.61,75.84 24.61,74.81 24.2,74.4 23.81,74.4 v1(23.43,74.78) ; C20.1 v1(10.03,75.97)
  BOTTOM w0.203: v1(23.43,74.78) 23.05,74.4 10.1,74.4 9.47,75.03 9.47,75.76 9.68,75.97 v1(10.03,75.97)
MIC_BIAS: length 27.1
  TOP w0.508: U2.48 v1(27.54,75.34) ; C18.2 R14.2 v1(7.4,71.7)
  BOTTOM w0.508: v1(7.4,71.7) 26.7,71.7 27.54,72.54 v1(27.54,75.34)
OUTL_N: length 11
  TOP w0.508: 54.34,67.2 L2.2 ; L2.2 56.2,65.34 ; L2.2 58.06,67.2 ; L2.2 56.2,69.06 ; 49.3,72.11 U4.2 ; U4.2 48.12,73.29 ; U4.2 49.3,74.47
OUTL_P: length 11
  TOP w0.508: 42.98,67.2 L1.2 ; L1.2 46.69,67.2 ; L1.2 44.84,69.06 ; L1.2 44.84,65.34 ; 51.8,72.11 U4.1 ; U4.1 52.98,73.29 ; U4.1 51.8,74.47
OUTR_N: length 9.1
  TOP w0.508: L4.2 78.4,69.06 ; L4.2 80.26,67.2 ; L4.2 78.4,65.34 ; 71.7,72.11 U5.2 ; U5.2 70.52,73.29 ; U5.2 71.7,74.47
OUTR_P: length 11
  TOP w0.508: U5.1 74.2,74.47 ; U5.1 74.2,72.11 ; U5.1 75.38,73.29 ; 67.5,65.34 L3.2 ; L3.2 69.36,67.2 ; L3.2 67.5,69.06 ; L3.2 65.64,67.2
RF_ANT: length 8.1
  TOP w0.508: U2.59 J1.1
RINN: length 6.6
  TOP w0.203: C14.2 65.7,27.12 65.9,27.32 66.19,27.32 66.4,27.53 66.4,27.93 65.93,28.39 64.81,28.39 64.3,28.9 64.3,29.62 64.17,29.74 U1.11
RINP: length 6.6
  TOP w0.203: U1.12 64.83,29.74 64.7,29.62 64.7,29.07 64.97,28.8 66.1,28.8 66.8,28.1 66.8,27.53 67.01,27.32 67.3,27.32 67.5,27.12 C19.2
SD: length 12.4
  TOP w0.203: U1.2 58.33,30.02 58,29.7 ; U1.1 57.67,30.02 58,29.7 ; R15.1 49.94,30.9 Q1.3 53.7,30.7 55.1,29.3 57.8,29.3 58,29.5 58,29.7
SPK_LN: length 102.5
  TOP w0.203: U2.56 18.21,77.85 17.9,78.16 17.9,79.4 18.79,80.29 36.61,80.29 37.89,79.01 37.89,22.61 38.81,21.69 57.07,21.69 57.6,22.23 57.6,22.97 57.81,23.18 58.1,23.18 58.3,23.38 C5.1
SPK_LP: length 102.5
  TOP w0.203: U2.57 17.19,77.85 17.5,78.16 17.5,79.57 18.63,80.7 36.77,80.7 38.3,79.17 38.3,22.77 38.97,22.1 56.9,22.1 57.2,22.4 57.2,22.97 56.99,23.18 56.7,23.18 56.5,23.38 C4.1
SPK_RN: length 131.2
  TOP w0.203: C14.1 66.72,25.3 69.67,25.3 70.5,24.47 70.5,14.8 69.6,13.9 37.3,13.9 35.69,15.51 35.69,77.83 34.88,78.65 20.14,78.65 19.94,78.45 19.94,78.16 20.24,77.85 U2.54
SPK_RP: length 128.5
  TOP w0.203: U2.55 19.23,77.85 19.53,78.16 19.53,78.62 19.97,79.06 35.04,79.06 36.1,78 36.1,15.67 37.47,14.31 69.43,14.31 70.09,14.97 70.09,24.31 69.51,24.89 68.19,24.89 67.58,24.28 C19.1
N17106206: length 9.5
  TOP w0.4: C8.2 61.58,26.24 61.58,30.9
  TOP w0.762: C8.2 59.7,24.32 R1.2
N17106914: length 9.9
  TOP w0.4: C7.2 61.85,22.22 R5.1 63.5,23.86 63.5,27.4 62.88,28.02 U1.9
N17107482: length 12.3
  TOP w0.4: C10.1 64.52,22.04 ; 64.52,22.04 R5.2 R9.1 ; 64.52,22.04 64.3,22.26 64.3,27.6 63.52,28.38 U1.10
N17107682: length 2.6
  TOP w0.4: U1.26 58.98,37.76 C1.2
N17107694: length 11.9
  TOP w0.4: U1.25 59.62,38.64 C1.1
  TOP w0.508: L1.1 44.84,49.06 ; L1.1 46.69,47.2 ; L1.1 42.98,47.2 ; L1.1 44.84,45.34
N17107988: length 6.1
  TOP w0.4: C6.2 61.58,40.89 61.58,36.5
N17107991: length 13.9
  TOP w0.4: U1.23 60.92,40.01 C6.1
  TOP w0.508: L2.1 58.06,47.2 ; L2.1 54.34,47.2 ; L2.1 56.2,45.34 ; L2.1 56.2,49.06
N17109509: length 6.1
  TOP w0.4: U1.21 62.23,40.79 C9.2
N17110158: length 13.9
  TOP w0.4: C9.1 62.88,39.91 U1.20
  TOP w0.508: 67.5,45.34 L3.1 ; L3.1 69.36,47.2 ; L3.1 65.64,47.2 ; L3.1 67.5,49.06
N17110390: length 11.9
  TOP w0.4: C11.1 64.17,38.64 U1.18
  TOP w0.508: 76.54,47.2 L4.1 ; L4.1 78.4,45.34 ; L4.1 80.26,47.2 ; L4.1 78.4,49.06
N17110423: length 2.6
  TOP w0.4: U1.17 64.83,37.76 C11.2
N17131851: length 4.5
  TOP w0.203: U2.12 10.07,64.16 R12.2 R10.1
N17139476: length 63.4
  TOP w0.203: R11.2 30.8,65.4 31.2,65 31.2,5.53 SW3.2
N17139479: length 76.1
  TOP w0.203: SW2.2 44.3,3.63 44.3,7 43.7,7.6 32.4,7.6 31.7,8.3 31.7,65.9 30.79,66.81 R6.2
N17139482: length 92.4
  TOP w0.203: SW1.2 59.6,3.93 59.6,7.1 58.6,8.1 32.8,8.1 32.2,8.7 32.2,66.8 30.8,68.2 R2.2
N17139571: length 67.1
  TOP w0.203: SW4.2 14.4,3.73 14.4,6.6 15.3,7.5 29.8,7.5 30.7,8.4 30.7,50.1 30.06,50.74 R13.2
N17139755: length 5.3
  TOP w0.508: U3.1 L5.2
N17140355: length 4.4
  TOP w0.508: C20.2 R14.1 L5.1 C21.2
N17141241: length 1.6
  TOP w0.203: Q2.3 R18.1
N17141960: length 1.8
  TOP w0.203: R19.2 C23.1
N17143378: length 1.8
  TOP w0.203: D1.2 R21.1
N17143400: length 1.8
  TOP w0.203: D2.2 R22.1
N17144540: length 1.8
  TOP w0.203: C22.1 50.95,24.18 R16.2
N17144552: length 4
  TOP w0.203: R16.1 R17.2 52.7,26.06 Q1.1
N17146514: length 4.2
  TOP w0.203: U6.3 15.51,31.75 R24.2 R26.1
N17146924: length 2.8
  TOP w0.203: R25.2 21.1,30.2 20.7,30.6 U6.4
N17147250: length 1.8
  TOP w0.203: U6.1 18.1,34.66 C24.2
N17153384: length 1.8
  TOP w0.203: D5.2 R27.1

## Copper pours and planes (outline as drawn; the poured copper is in the pictures)
GND on TOP: 3.5,89.5 147.2,89.5 149.5,87.2 149.5,4.9 145.1,0.5 4.7,0.5 0.4,4.8 0.4,86.4 ; 12 cut-outs
GND on BOTTOM: 147.2,89.5 3.5,89.5 0.4,86.4 0.4,4.8 4.7,0.5 145.1,0.5 149.5,4.9 149.5,87.2 ; 2 cut-outs
VCC_3.3V on TOP: 23.9,57 24.7,57 24.7,54.3 24.5,54.1 23.1,54.1 22.9,54.3 22.9,57 23.7,57 23.7,55.8 23.9,55.8
VCC_3.3V on TOP: 17.2,40.4 18.4,40.4 18.4,36.5 18,36.5 17.7,36.2 17.7,35 17.4,34.7 11.5,34.7 11.2,35 11.2,37.2 11.4,37.4 16.6,37.4 16.9,37.7 16.9,40.1
VCC_3.3V on BOTTOM: 11.6,34.6 16.7,34.6 16.9,34.8 16.9,53.8 17.2,54.1 24.5,54.1 24.7,54.3 24.7,55.6 24.6,55.7 12.5,55.7 11.2,54.4 11.2,35
VCC_24V on TOP: 58.5,37.3 51.8,37.3 51.4,36.9 51.4,35.7 51.7,35.4 58.2,35.4 58.5,35.7
VCC_24V on TOP: 60.6,18 60.6,20.6 60.5,20.7 56.9,20.7 56.7,20.5 56.7,19.4 56.9,19.2 58.2,19.2 58.4,19 58.4,18
VCC_24V on TOP: 65.3,37.3 73.2,37.3 74.3,38.4 79.5,38.4 80.1,37.8 80.1,34.9 79.6,34.4 66.5,34.4 65.3,35.6
VCC_24V on TOP: 20.1,33 21.8,33 22.5,33.7 24.5,33.7 24.5,31.7 24.8,31.4 27.5,31.4 28,30.9 28,28.7 27.6,28.3 23.6,28.3 23.3,28.6 23.3,30.7 23,31 21.9,31 21.7,31.2 21.7,32.1 21.4,32.4 20.1,32.4
VCC_24V on BOTTOM: 126.7,61 131.3,61 131.5,60.8 131.5,35.5 129.9,33.9 82.6,33.9 82.1,33.4 82.1,14.5 81.4,13.8 57.1,13.8 56.5,14.4 56.5,20.6 56.7,20.8 58.8,20.8 59,20.6 59,17.2 58.1,16.3 58.1,15.4 58.3,15.2 80.3,15.2 81,15.9 81,33.3 80.4,33.9 74.2,33.9 72.8,35.3 28.1,35.3 27.8,35 27.8,28.8 27.5,28.5 25.5,28.5 25.3,28.7 25.3,36.8 25.9,37.4 73.2,37.4 74.3,38.5 124.9,38.5 126.3,39.9 126.3,60.6
VCC_24V_IN on TOP: 132.2,56.5 140.5,56.5 141.2,57.2 141.2,78.7 140.4,79.5 133.6,79.5 131.6,77.5 129,77.5 127.7,78.8 123.3,78.8 122.7,79.4 122.7,82.5 122.2,83 118.3,83 117.8,82.5 117.8,75.2 118.5,74.5 121.8,74.5 122.2,74.1 122.2,68.8 131.2,68.8 131.6,68.4 131.6,57.1
OUTL_N on TOP: 59,64.6 59.4,65 59.4,75.9 58.6,76.7 48,76.7 47.3,76 47.3,72.1 47.6,71.8 49.9,71.8 50.1,72 50.1,74.8 50.4,75.1 53.5,75.1 53.9,74.7 53.9,65.3 54.6,64.6
OUTL_P on TOP: 41.7,70.5 41.7,65.3 42.4,64.6 52.5,64.6 53.3,65.4 53.3,74.5 53.1,74.7 51.1,74.7 50.9,74.5 50.9,71 50.4,70.5
OUTR_N on TOP: 81.5,64.6 81.9,65 81.9,75.9 81.1,76.7 70.5,76.7 69.8,76 69.8,72.1 70.1,71.8 72.4,71.8 72.6,72 72.6,74.8 72.9,75.1 76,75.1 76.4,74.7 76.4,65.3 77.1,64.6
OUTR_P on TOP: 64.2,70.5 64.2,65.3 64.9,64.6 75,64.6 75.8,65.4 75.8,74.5 75.6,74.7 73.6,74.7 73.4,74.5 73.4,71 72.9,70.5
N17107694 on TOP: 48.6,49.6 42.9,49.6 42,48.7 42,40.5 42.8,39.7 58.3,39.7 59.4,38.6 59.8,38.6 59.8,39.7 58.8,40.7 57.5,40.7
N17107991 on TOP: 54,49.6 58.8,49.6 59.3,49.1 59.3,41.9 61,40.2 61,39.2 60.8,39.2 59,41 57.8,41 53.5,45.3 53.5,49.1
N17110158 on TOP: 64.6,41.9 64.6,49.2 65,49.6 71.1,49.6 71.5,49.2 71.5,45.9 66.7,41.1 64.9,41.1 63,39.2 62.7,39.2 62.7,40
N17110390 on TOP: 67.1,40.7 64.9,40.7 64,39.8 64,38.3 64.1,38.2 64.2,38.2 64.4,38.4 64.4,38.6 65.6,39.8 81.5,39.8 82,40.3 82,49.1 81.4,49.7 76.1,49.7
N17146336 on TOP: 20.1,33.4 20.1,40.1 20.3,40.3 23.5,40.3 23.8,40 23.8,34.2 23.6,34 22,34 21.4,33.4
N17149786 on TOP: 58.4,77.1 40.1,77.1 39.6,77.6 39.6,79.6 39.8,79.8 58.5,79.8 58.7,79.6 58.7,77.4
N17149794 on TOP: 67.9,77.1 86.3,77.1 86.7,77.5 86.7,79.5 86.4,79.8 68,79.8 67.5,79.3 67.5,77.5

## Text on the board
Ref Des/Silkscreen Bottom: TPA311X_TEST_V10B | 20200817 | XXXLZJXXX
Ref Des/Silkscreen Top: LRCK | 3V3 | DOUT | DIN | BCK | GND | MFB | VOL++ | VOL-- | PLAY | VIN | 12V----24V | LED- | LED+
DEVICE_TYPE_TOP: FIGURE | FINISHED_SIZE | 0.3048 | 0.8 | 0.9 | 1.0 | 1.1 | 1.3 | 1.5 | 1.8 | 2.0 | 3.1 | 3.0x1.0 | DRILL CHART: TOP to BOTTOM | ALL UNITS ARE IN MILLIMETERS | ROTATION | - | 90.000 | 0.000 | PLATED | QTY | 337 | 2 | 11 | 9 | 6 | 5 | 8 | 12 | 10 | 1 | 405 | TOTAL HOLES:
